# Altium PCB PCB layout.PcbDoc
Units mil, origin at the board's own origin, x right, y up, seen from the top; angles counter-clockwise.
Board outline 3670 x 2550 mil, 2 copper layers (Top Layer, Bottom Layer); 38 components, 49 nets, 170 pads, 6 vias.
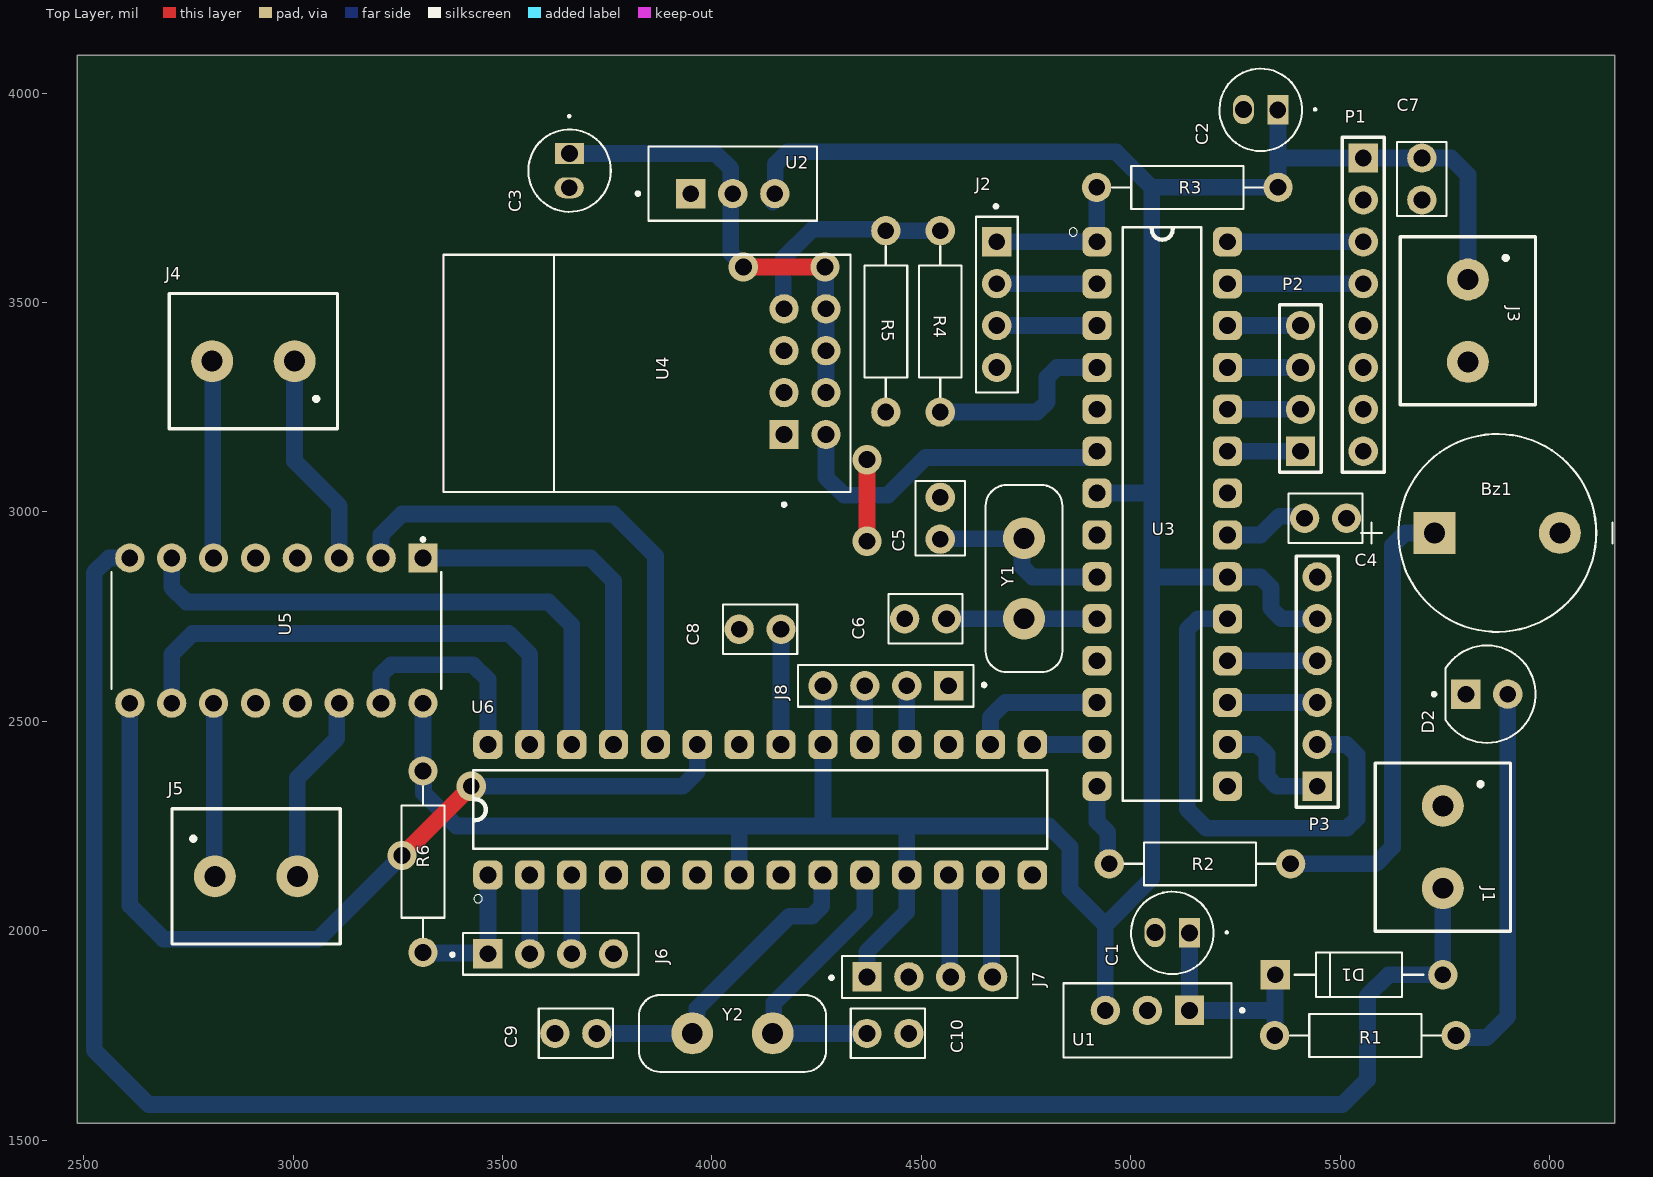
[diagram p0: Top Layer view]
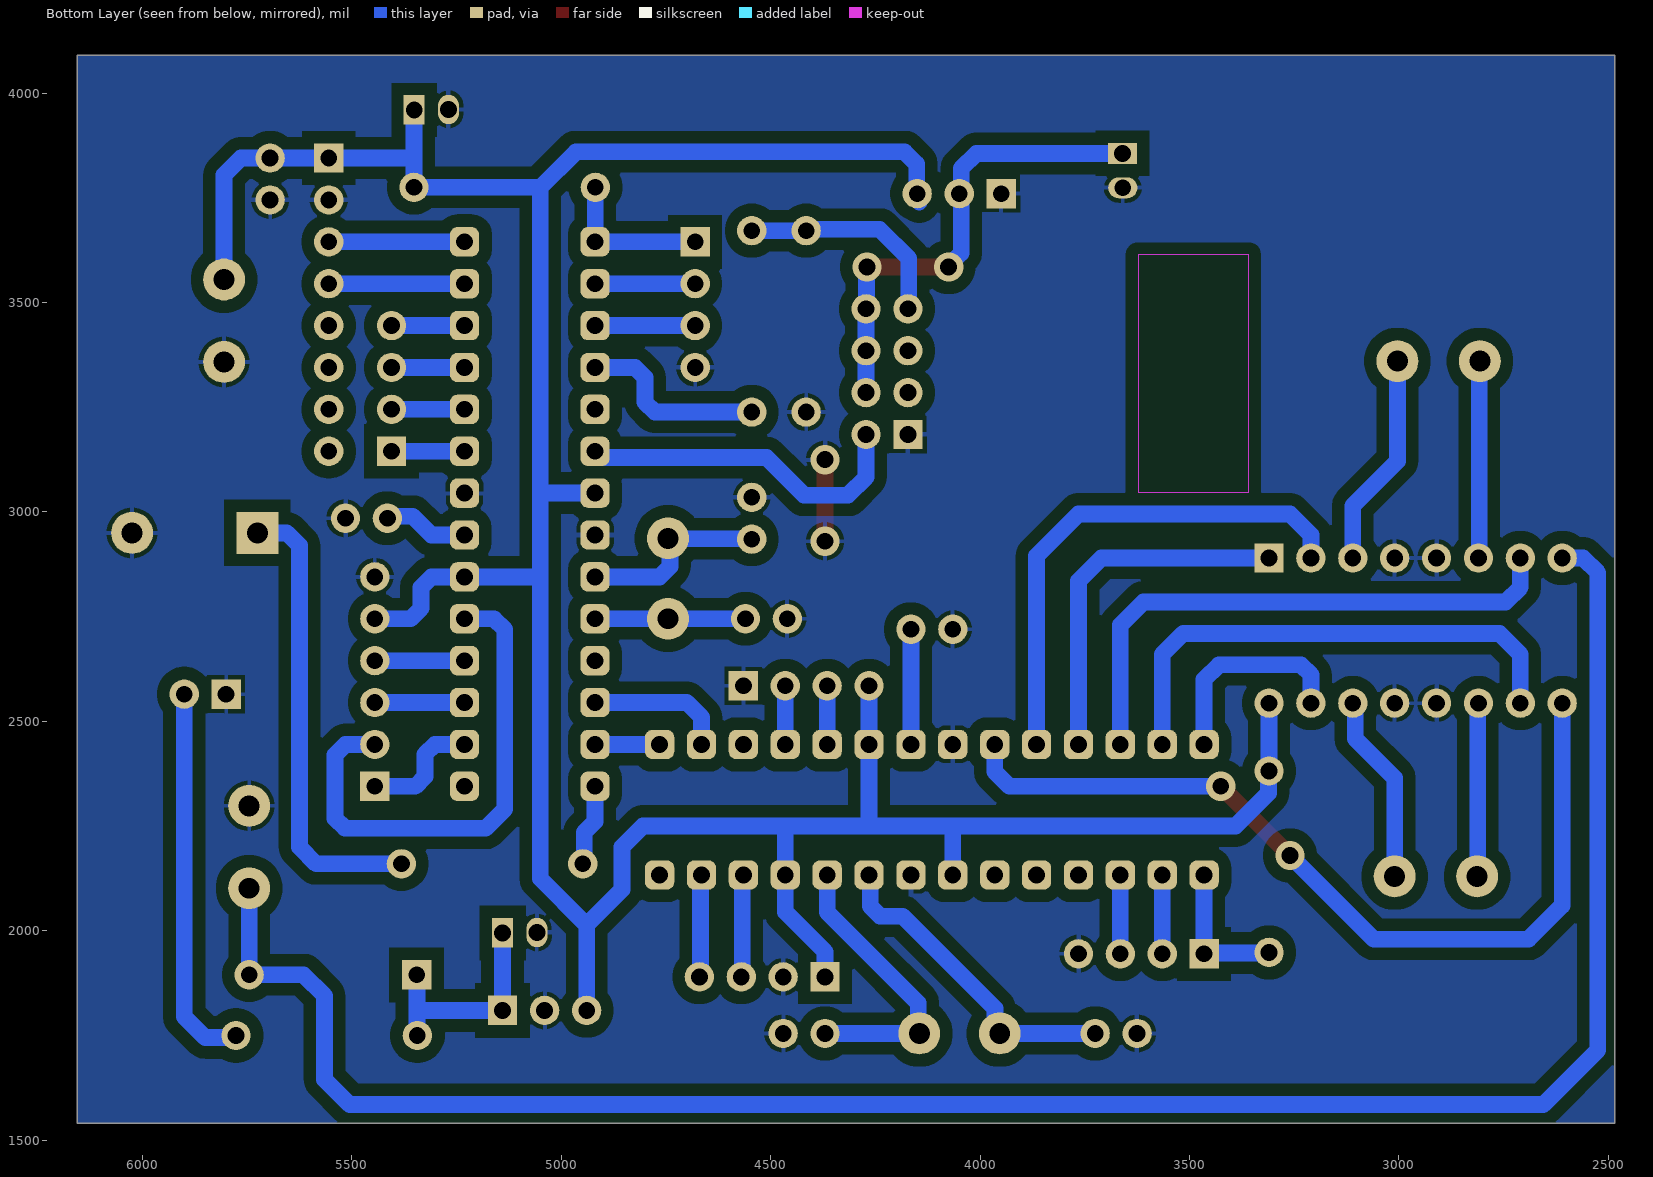
[diagram p1: Bottom Layer view, seen from below]
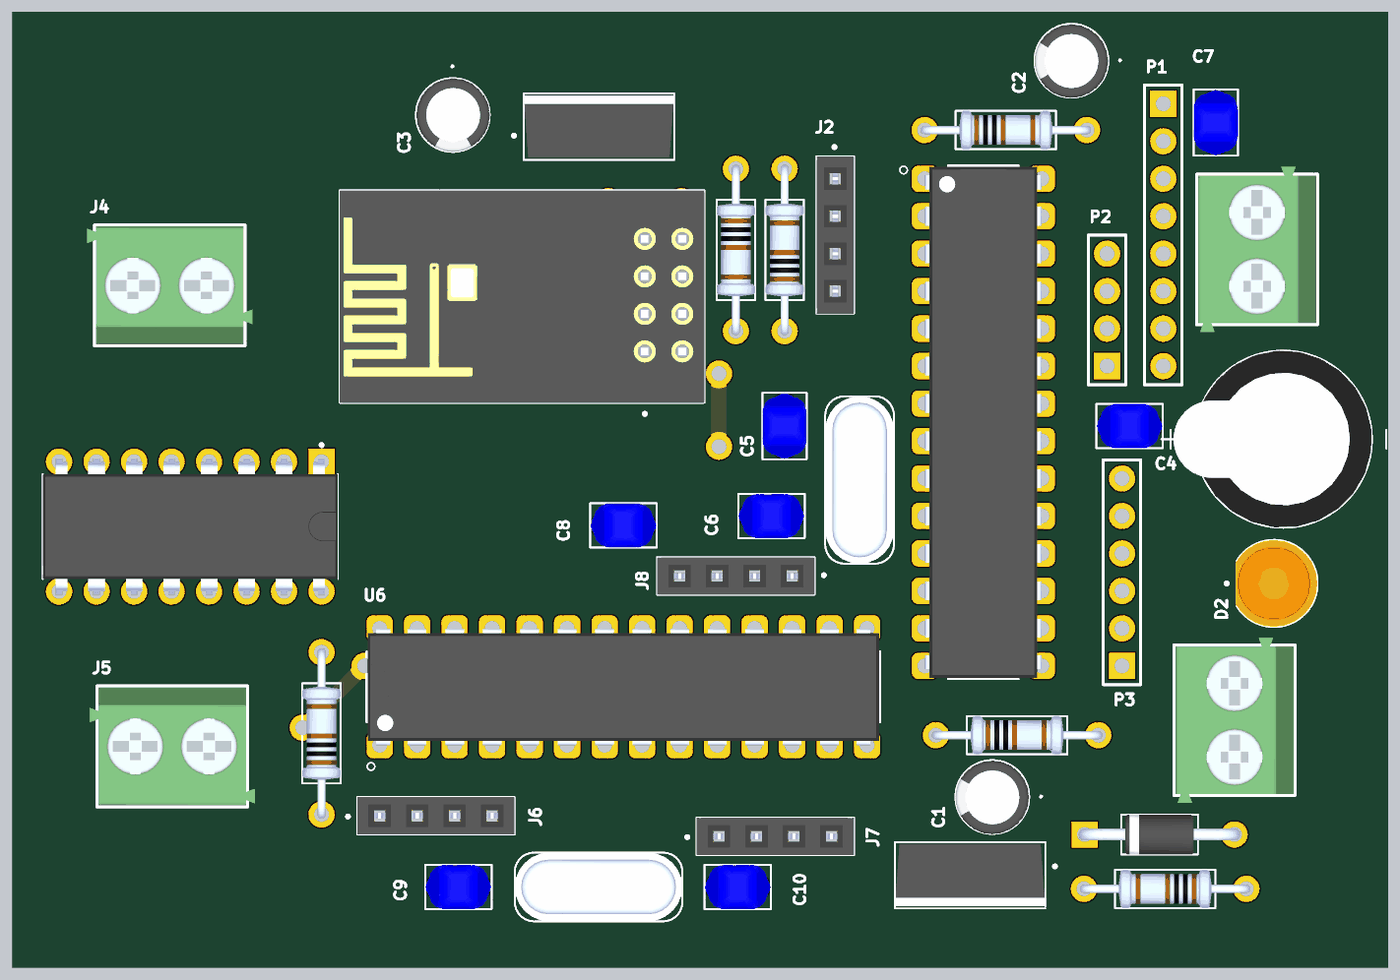
[diagram p2: 3D render of the assembled board from above, using the file's embedded part models]

## Layer stack, top to bottom
Top Solder: solder mask 0.4, Solder Resist, Dk 3.5
Top Layer: signal copper 1.4
Dielectric 1: dielectric 12.6, FR-4, Dk 4.8
Bottom Layer: signal copper 1.4
Bottom Solder: solder mask 0.4, Solder Resist, Dk 3.5

## Board outline
2485,1540 6155,1540 6155,4090 2485,4090

## Design rules (kind name [scope] priority, off if disabled: settings)
Clearance [All] p1: gap=30 ignorepadtopadclearanceinfootprint=FALSE
PolygonConnect [All] p1: connectstyle=Relief reliefconductorwidth=10 reliefentries=4 polygonreliefangle="90 Angle" airgapwidth=10
RoutingVias [All] p1: holewidth=40 width=70 viastyle="Through Hole" minholewidth=40 minwidth=70 maxholewidth=40 maxwidth=70
SolderMaskExpansion [All] p1: expansion=4 istentingtop=FALSE
Width [All] p1: maxlimit=60 minlimit=40 preferedwidth=50
30 further rules are at their usual default settings.

## Classes and differential pairs
component class "schematic sheet2": C7 C8 C9 C10 J3 J4 J5 J6 J7 J8 R6 U5 U6 Y2
component class "schematic sheet1": Bz1 C1 C2 C3 C4 C5 C6 D1 D2 J1 J2 P1 P2 P3 R1 R2 R3 R4 R5 U1 U2 U3 U4 Y1

## Components (designator, comment, footprint, x,y, rotation, side; value= is the part's Value field where it differs from the comment)
Bz1 "AI-1223-TWT-12V-R" XDCR_AI-1223-TWT-12V-R 5875,2950 r90 top
C1 "100uF" CAPPRD500W50D500H1100 5099,1995 r180 top
C2 "10uF" CAPPRD500W50D500H1100 5310,3960 r180 top
C3 "10uF" CAPPRD500W50D500H1100 3660,3815 r270 top
C4 "100nF" CAPRB500W50L450T300H550 5415,2985 r0 top
C5 "22pF" CAPRB500W50L450T300H550 4545,2935 r90 top
C6 "22pF" CAPRB500W50L450T300H550 4560,2745 r180 top
C7 "100nF" CAPRB500W50L450T300H550 5695,3745 r90 top
C8 "100nF" CAPRB500W50L450T300H550 4165,2720 r180 top
C9 "22pF" CAPRB500W50L450T300H550 3725,1755 r180 top
C10 "22pF" CAPRB500W50L450T300H550 4370,1755 r0 top
D1 "1N4007" DIOAD1060W80L520D270 5545,1895 r0 top
D2 "L08R5000Q1" LEDRD254W57D500H1070 5850,2565 r0 top
J1 "TBlock 2" 691111710002 5745,2200 r270 top
J2 "Header 4" SULLINS_PPTC041LFBN-RC 4680,3495 r270 top
J3 "TBlock 2" 691111710002 5805,3456.57 r270 top
J4 "691111710002" 691111710002 2905,3360 r180 top
J5 "691111710002" 691111710002 2911.57,2130 r0 top
J6 "Header 4" SULLINS_PPTC041LFBN-RC 3615,1945 r0 top
J7 "Header 4" SULLINS_PPTC041LFBN-RC 4520,1890 r0 top
J8 "Header 4" SULLINS_PPTC041LFBN-RC 4415,2585 r180 top
P1 "Header 8" HDR1X8 5555,3845 r270 top
P2 "Header 4" HDR1X4 5405,3145 r90 top
P3 "Header 6" HDR1X6 5445,2345 r90 top
R1 "1k" RESAD1100W55L680D260 5560,1750 r0 top
R2 "100" RESAD1100W55L680D260 5165,2160 r180 top
R3 "10k" RESAD1100W55L680D260 5135,3775 r180 top
R4 "1k1" RESAD1100W55L680D260 4545,3455 r270 top
R5 "2.2k" RESAD1100W55L680D260 4415,3455 r90 top
R6 "10k" RESAD1100W55L680D260 3310,2165 r270 top
U1 "LM7805" TO255P1020X450X1968-3 5039.61,1786.18 r180 top
U2 "LD1117V33" TO255P1020X450X1968-3 4049.61,3783.82 r0 top
U3 "ATMEGA328P-PU" DIP794W46P254L2967H457Q28B 5075,2995 r0 top
U4 "ESP8266-01/ESP-01" XCVR_ESP8266-01/ESP-01 3845,3335 r90 top
U5 "L293D" DIP880W50P254L2000H510Q16 2960,2716.77 r270 top
U6 "ATMEGA328P-PU" DIP794W46P254L2967H457Q28B 4115,2289.09 r90 top
Y1 "16MHz" XTAL_ECS-160-20-4X 4745,2841.06 r270 top
Y2 "16MHz" XTAL_ECS-160-20-4X 4048.94,1755 r0 top

## Footprints (in the part's own frame and the unit in brackets; to place one, negate y for a bottom-side part, rotate by r counter-clockwise, add the part's x,y. Pads: shape width x height; smd on the part's side, far side on the other; paste and mask are expansions set on the pad)
691111710002 [mm]
  round 2.54 hole 1.27: 1(-2.5,0) 2(2.5,0)
  silkscreen extent -5.1,-4.1 5.1,4.1, body extent -5.6,-4 5.6,4, height 11.01
CAPPRD500W50D500H1100 [mil]
  oval 50x70 hole 40: N(41,-1)
  rect 50x70 hole 40: P(-41,0)
  silkscreen extent -131,-98 98,98, body extent -108,-97 108,99, height 434
CAPRB500W50L450T300H550 [mil]
  round 70 hole 40: 1(0,0) 2(100,0)
  silkscreen extent -39,-59 139,59, body extent -38,-59 138,59, height 210
DIOAD1060W80L520D270 [mil]
  round 70 hole 40: A(200,0)
  rect 70x70 hole 40: C(-200,0)
  silkscreen extent -154,-53 154,53, body extent -216,-53 216,53, height 99
DIP794W46P254L2967H457Q28B [mil]
  rrect50% 70x70 hole 40: 1(-155.91,650) 2(-155.91,550) 3(-155.91,450) 4(-155.91,350) 5(-155.91,250) 6(-155.91,150) 7(-155.91,50) 8(-155.91,-50) 9(-155.91,-150) 10(-155.91,-250) 11(-155.91,-350) 12(-155.91,-450) 13(-155.91,-550) 14(-155.91,-650) 15(155.91,-650) 16(155.91,-550) 17(155.91,-450) 18(155.91,-350) 19(155.91,-250) 20(155.91,-150) 21(155.91,-50) 22(155.91,50) 23(155.91,150) 24(155.91,250) 25(155.91,350) 26(155.91,450) 27(155.91,550) 28(155.91,650)
  silkscreen extent -223,-685 94,685, body extent -156,-682 156,683, height 180
DIP880W50P254L2000H510Q16 [mil]
  rect 70x70 hole 40: 1(-173.23,350)
  round 70 hole 40: 2(-173.23,250) 3(-173.23,150) 4(-173.23,50) 5(-173.23,-50) 6(-173.23,-150) 7(-173.23,-250) 8(-173.23,-350) 9(173.23,-350) 10(173.23,-250) 11(173.23,-150) 12(173.23,-50) 13(173.23,50) 14(173.23,150) 15(173.23,250) 16(173.23,350)
  silkscreen extent -221,-394 140,394, body extent -182,-394 182,394, height 201
HDR1X4 [mil] "Connector; Header; 4 Position"
  rect 70x70 hole 40: 1(0,0)
  round 70 hole 40: 2(100,0) 3(200,0) 4(300,0)
  silkscreen extent -50,-50 350,50
HDR1X6 [mil] "Connector; Header; 6 Position"
  rect 70x70 hole 40: 1(0,0)
  round 70 hole 40: 2(100,0) 3(200,0) 4(300,0) 5(400,0) 6(500,0)
  silkscreen extent -50,-50 550,50
HDR1X8 [mil] "Connector; Header; 8 Position"
  rect 70x70 hole 40: 1(0,0)
  round 70 hole 40: 2(100,0) 3(200,0) 4(300,0) 5(400,0) 6(500,0) 7(600,0) 8(700,0)
  silkscreen extent -50,-50 750,50
LEDRD254W57D500H1070 [mil]
  round 70 hole 40: A(50,0)
  rect 70x70 hole 40: C(-50,0)
  silkscreen extent -130,-116 116,116, body extent -102,-116 116,116, height 358
RESAD1100W55L680D260 [mil]
  round 70 hole 40: 1(-216.54,0) 2(216.54,0)
  silkscreen extent -180,-51 180,51, body extent -227,-51 227,51, height 101
SULLINS_PPTC041LFBN-RC [mil]
  rect 70x70 hole 40: 1(-150,0)
  round 70 hole 40: 2(-50,0) 3(50,0) 4(150,0)
  silkscreen extent -239,-50 210,50, body extent -210,-50 210,50, height 335
TO255P1020X450X1968-3 [mil]
  rect 70x70 hole 40: 1(-100.39,-23.82)
  round 70 hole 40: 2(0,-23.82) 3(100.39,-23.82)
  silkscreen extent -230,-89 201,89, body extent -200,-82 200,83, height 901
XCVR_ESP8266-01/ESP-01 [mil]
  rect 70x70 hole 40: 1(-150,-327.17)
  round 70 hole 40: 2(-50,-327.17) 3(50,-327.17) 4(150,-327.17) 5(-150,-427.17) 6(-50,-427.17) 7(50,-427.17) 8(150,-427.17)
  Keep-Out Layer region: 279.13,222.44 -287.8,222.44 -287.8,486.22 279.13,486.22
  silkscreen extent -321,-486 279,486, body extent -288,-486 278,486, height 256
XDCR_AI-1223-TWT-12V-R [mm]
  round 2.54 hole 1.27: N(0,-3.8)
  rect 2.54x2.54 hole 1.27: P(0,3.8)
  silkscreen extent -6,-6.98 6,8.25, body extent -6,-6 6,7.44, height 9.56
XTAL_ECS-160-20-4X [mm]
  round 2.54 hole 1.27: 1(-2.44,0) 2(2.44,0)
  silkscreen extent -5.68,-2.33 5.68,2.33, body extent -5.68,-2.32 5.68,2.32, height 3.5

## Part data
Bz1: library part Buzzer, "ELECTRO-MECHANICAL AUDIO INDICATOR", Package="2225 PUI Audio", Availability="In Stock", MF="PUI Audio,", MP=AI-1223-TWT-12V-R, Price=None, Purchase-URL=https://pricing.snapeda.com/search/part/AI-1223-TWT-12V-R/?ref=eda
C1 C2 C3: library part "Electrolytic capacitor", "FS-A", Package=None, Availability=Unavailable, MF="{'manufacturer': u'Panasonic'}", MP=EEUFS0J221B, Price=None
C4 C5 C6 C7 C8 C9 C10: library part "Ceramic capacitor", "2200 pF Â±10% 250V Ceramic Capacitor X7R Radial", Package="Radial TDK", Check_prices=https://www.snapeda.com/parts/FG24X7R2E222KNT06/TDK/view-part/?ref=eda, Digi-Key_Part_Number=445-173386-1-ND, MF=TDK, MP=FG24X7R2E222KNT06, Purchase-URL=https://pricing.snapeda.com/search/part/FG24X7R2E222KNT06/?ref=eda, SnapEDA_Link=https://www.snapeda.com/parts/FG24X7R2E222KNT06/TDK/view-part/?ref=snap
D1: "Diode Switching 1KV 1A 2-Pin DO-41", Package=None, Availability=Unavailable, MP=1N4007, Price=None
D2: library part LED, "LED, Orange, Through Hole, T-1 3/4 (5mm), 30 mA, 2.1 V, 635 nm", Package=None, Availability=Unavailable, MF="{'manufacturer': u'LED Technology'}", MP=L08R5000Q1, Price=None
J1 J3 J4 J5: library part "Terminal Block - 2Pins", "2 Position Wire to Board Terminal Block Horizontal with Board 0.197 _5.00mm_ Through Hole", Package=None, Availability=Unavailable, MF="Wurth Electronics", MP=691111710002, Price=None, SnapEDA_Link=https://www.snapeda.com/parts/691111710002/Wurth%20Electronics%20Inc./view-part/1195092/?ref=snap
J2 J6 J7 J8: library part "Female header - 4Pins", "4 Position Header Connector Through Hole", Package=None, Availability=Warning, Check_prices=https://www.snapeda.com/parts/PPTC041LFBN-RC/Sullins%20Connector%20Solutions/view-part/285917/?ref=eda, MF="Sullins Connector", MP=PPTC041LFBN-RC, Price=None, Purchase-URL=https://pricing.snapeda.com/search/part/PPTC041LFBN-RC/?ref=eda, SnapEDA_Link=https://www.snapeda.com/parts/PPTC041LFBN-RC/Sullins%20Connector%20Solutions/view-part/285917/?ref=snap
P1: "Header, 8-Pin", LatestRevisionDate=17-Jul-2002, LatestRevisionNote="Re-released for DXP Platform.", Publisher="Altium Limited"
P2: "Header, 4-Pin", LatestRevisionDate=17-Jul-2002, LatestRevisionNote="Re-released for DXP Platform.", Publisher="Altium Limited"
P3: "Header, 6-Pin", LatestRevisionDate=17-Jul-2002, LatestRevisionNote="Re-released for DXP Platform.", Publisher="Altium Limited"
R1 R2 R3 R4 R5 R6: library part "Resistor (0.25W)", "(MFR-25FBF52-10K) 10,2 kOhm bei 1% 0,25W, 1/4W Durchbohrlochwiderstand Axial Metal Film", Package="Axial Yageo", Digi-Key_Part_Number=10.2KXBK-ND, MF=Yageo, MP=MFR-25FBF52-10K, Purchase-URL=https://pricing.snapeda.com/search/part/MFR-25FBF52-10K/?ref=eda, SnapEDA_Link=https://www.snapeda.com/parts/MFR-25FBF52-10K/Yageo/view-part/424333/?ref=snap
U1: library part LM78__, Package=None, Availability=Unavailable, MP=LM7805CT/NOPB, Price=None
U2: Package=None, Availability=Unavailable, MP=LD1117V33, Price=None
U3 U6: "ATmega Series 20 MHz 32 KB Flash 2 KB SRAM 8-Bit Microcontroller - DIP-28", Package=None, Availability=Unavailable, MP=ATMEGA328P-PU, Price=None
U4: library part "ESP8266-01 Module", "MakerFocus 4pcs ESP8266 ESP-01 Serial Wireless WiFi Transceiver Receiver Module 1MB SPI Flash DC3.0-3.6V Internet of Things WiFi Module Board Compatible with Ar duino", Package=None, Availability=Unavailable, MP=ESP8266-01/ESP-01, Price=None
U5: "4-Channel Motor Driver 24V 16-Pin Power PDIP Tube", Package=None, Availability=Unavailable, MP=L293D, Price=None
Y1 Y2: library part "Crystal oscilator", "CRYSTAL T/H", Package=None, Availability=Unavailable, MF="{'manufacturer': u'ECS Inc.'}", MP=ECS-160-S-4, Price=None

## Via types
v1: diameter 70, hole 40, Top Layer to Bottom Layer, 6 vias

## Nets (pads, with @x,y where several pads share a name; then routed paths per layer and width w, separated by ;. In a path a pad name is that pad's centre, name@x,y a point inside that pad or via, vN(x,y) a via of type N, cw(c..) or ccw(c..) an arc to the next point about the centre after c; other vN are vias at no path point)
+3V3: C3.P U2.2 U4.6 U4.7 U4.8 | length 1143.2
  Top Layer w40: v1(4075,3585) v1(4270,3585)
  Bottom Layer w40: C3.P 4009,3856 4045,3820 4045,3740 4045,3617.71 4075,3587.71 v1(4075,3585) ; v1(4270,3585) 4271.08,3583.92 4271.08,3486.08 U4.8 U4.7 U4.6
alcohol: P2.4 U3.26 | length 174.1
  Bottom Layer w40: U3.26 P2.4
Battery: D1.A J1.2 U5.8 | length 4965.5
  Bottom Layer w40: U5.8 2560,2890 2525,2855 2525,1715 2655,1585 5505,1585 5565,1645 5565,1845 5615,1895 D1.A J1.2
bt_rx: J7.4 U6.13 | length 245.3
  Bottom Layer w40: U6.13 4667.5,2130.69 4667.5,1892.5 J7.4
bt_tx: J7.3 U6.12 | length 245.3
  Bottom Layer w40: U6.12 4567.5,2130.69 4567.5,1892.5 J7.3
buzzer: R2.2 U3.14 | length 197.2
  Bottom Layer w40: U3.14 4919.09,2260.91 4945,2235 4945,2163.46 R2.2
CS: P3.1 U3.16 | length 286.6
  Bottom Layer w40: U3.16 5301.57,2445 5325,2421.57 5325,2368.43 5348.43,2345 P3.1
esp_rx: R4.2 U3.4 | length 453.2
  Bottom Layer w40: R4.2 4776.57,3238.46 4800,3261.9 4800,3321.57 4823.43,3345 U3.4
esp_tx: U3.6 U4.5 | length 810.3
  Bottom Layer w40: U4.5 4272.17,3082.83 4315,3040 4420,3040 4510,3130 4904.09,3130 U3.6
flame: P2.1 U3.23 | length 174.1
  Bottom Layer w40: U3.23 P2.1
GND: Bz1.N C1.N C2.N C3.N C4.2 C5.2 C6.2 C7.1 C8.2 C9.2 C10.2 D2.C J1.1 J2.4 J3.2 J6.4 J7.2 J8.1 P1.2 P3.6 R5.1 U1.2 U2.1 U3.8 U3.22 U4.1 U5.4 U5.5 U5.12 U5.13 U6.8 U6.22 | length 195
  Top Layer w40: v1(4370,2930) v1(4370,3125)
gps_rx: J8.3 U6.19 | length 140
  Bottom Layer w40: U6.19 J8.3
gps_tx: J8.2 U6.18 | length 140
  Bottom Layer w40: U6.18 J8.2
MISO: P3.4 U3.18 | length 214.1
  Bottom Layer w40: U3.18 P3.4
MOSI: P3.3 U3.17 | length 214.1
  Bottom Layer w40: U3.17 P3.3
motor_enable1: U5.1 U6.25 | length 867.8
  Bottom Layer w40: U5.1 3710,2890 3765,2835 U6.25
motor_enable2: U5.9 U6.23 | length 2102.4
  Top Layer w40: v1(3260,2180) v1(3425,2345)
  Bottom Layer w40: U5.9 2610,2060 2690,1980 3060,1980 v1(3260,2180) ; v1(3425,2345) 3930,2345 3965,2380 U6.23
motor_pin1: U5.2 U6.24 | length 1222.1
  Bottom Layer w40: U5.2 3210,2945 3260,2995 3765,2995 3865,2895 U6.24
motor_pin2: U5.7 U6.26 | length 1347.3
  Bottom Layer w40: U5.7 2710,2820 2745,2785 3610,2785 3665,2730 U6.26
motor_pin3: U5.10 U6.27 | length 1227.9
  Bottom Layer w40: U5.10 2710,2660 2760,2710 3515,2710 3565,2660 U6.27
motor_pin4: U5.15 U6.28 | length 502.2
  Bottom Layer w40: U5.15 3210,2611.57 3233.43,2635 3430,2635 3465,2600 U6.28
NetBz1_P: Bz1.P R2.1 | length 1092.9
  Bottom Layer w40: R2.1 5585,2160 5625,2200 5625,2920 5655,2950 Bz1.P
NetC1_P: C1.P D1.C R1.1 U1.1 | length 525.7
  Bottom Layer w40: C1.P@5138,1985 5140.04,1982.96 U1.1 ; U1.1 5344.23,1810 ; R1.1 5344.23,1750.77 5344.23,1810 ; D1.C 5344.23,1894.23 5344.23,1810
NetC4_1: C4.1 U3.21 | length 204.8
  Bottom Layer w40: U3.21 5310,2945 5355,2990 5410,2990 C4.1
NetC8_1: C8.1 U6.21 | length 275
  Bottom Layer w40: U6.21 C8.1
NetD2_A: D2.A R1.2 | length 916.2
  Bottom Layer w40: R1.2 5781.54,1745 5850,1745 5900,1795 D2.A
NetJ4_1: J4.1 U5.3 | length 514.1
  Bottom Layer w40: J4.1 3003.43,3121.57 3110,3015 U5.3
NetJ4_2: J4.2 U5.6 | length 471.4
  Bottom Layer w40: J4.2 2808.29,3358.29 2808.29,2891.71 U5.6
NetJ5_1: J5.1 U5.11 | length 414.8
  Bottom Layer w40: U5.11 2811.57,2541.97 2811.57,2131.57 J5.1
NetJ5_2: J5.2 U5.14 | length 455
  Bottom Layer w40: J5.2 3010,2365 3104.26,2459.26 3104.26,2537.8 U5.14
NetR4_1: R4.1 R5.2 U4.4 | length 525.6
  Bottom Layer w40: U4.4@4170,3485 4170,3605.21 4239.79,3675 4411.54,3675 R5.2 R4.1
NetU3_12: U3.12 U6.16 | length 333.6
  Bottom Layer w40: U6.16 4665,2510 4700,2545 U3.12
NetU3_13: U3.13 U6.15 | length 154.1
  Bottom Layer w40: U6.15 U3.13
reset1: J2.1 R3.2 U3.1 | length 369.4
  Bottom Layer w40: J2.1 U3.1 4918.78,3645.32 4918.78,3774.69 R3.2
reset2: J6.1 R6.2 U6.1 | length 344.6
  Bottom Layer w40: R6.2 3311.73,1946.73 3463.27,1946.73 J6.1 U6.1
rx1: J2.3 U3.3 | length 239.1
  Bottom Layer w40: J2.3 U3.3
rx2: J6.3 U6.3 | length 188.2
  Bottom Layer w40: J6.3 U6.3
SCK: P3.2 U3.19 | length 1226.5
  Bottom Layer w40: U3.19 5160,2745 5135,2720 5135,2290 5180,2245 5516.57,2245 5540,2268.43 5540,2420 5515,2445 P3.2
SCL: P1.3 U3.28 | length 324.1
  Bottom Layer w40: U3.28 P1.3
SDA: P1.4 U3.27 | length 324.1
  Bottom Layer w40: U3.27 P1.4
smoke: P2.2 U3.24 | length 174.1
  Bottom Layer w40: U3.24 P2.2
tx1: J2.2 U3.2 | length 239.1
  Bottom Layer w40: J2.2 U3.2
tx2: J6.2 U6.2 | length 188.2
  Bottom Layer w40: J6.2 U6.2
VCC: C2.P C7.2 J3.1 J7.1 J8.4 P1.1 P3.5 R3.1 R6.1 U1.3 U2.3 U3.7 U3.20 U5.16 U6.7 U6.11 U6.20 | length 7746.6
  Bottom Layer w40: U5.16 R6.1 3311.41,2380.13 3311.41,2328.59 3390,2250 4065,2250 ; U6.7 4065,2250 ; U2.3@4145.39,3740 4145.39,3760 4151.13,3765.74 4151.13,3831.13 4180,3860 4965,3860 5050,3775 5050,3770 ; J8.4 U6.20 4265,2250 ; J7.1 4370,1950 4465,2045 U6.11 4465,2250 ; U3.7 5040,3045 5050,3035 ; U1.3 4939.21,2014.21 ; C2.P 5351.27,3959.73 5351.27,3850 ; P3.5 5360,2745 5335,2770 5335,2820 5310,2845 U3.20 5050,2845 ; J3.1 5805,3805 5765,3845 C7.2 P1.1 5356.27,3845 5351.27,3850 ; 4065,2250 4265,2250 ; 4265,2250 4465,2250 ; 4465,2250 4805,2250 4855,2200 4855,2098.43 4939.21,2014.21 ; 4939.21,2014.21 5050,2125 5050,2845 ; 5050,2845 5050,3035 ; 5050,3035 5050,3770 ; 5050,3770 5055,3775 R3.1 5351.27,3775.27 5351.27,3850
vibration: P2.3 U3.25 | length 174.1
  Bottom Layer w40: U3.25 P2.3
xtal1_1: C5.1 U3.9 Y1.1 | length 458
  Bottom Layer w40: C5.1 4546.06,2936.06 Y1.1@4743.94,2936.06 ; Y1.1 Y1.1@4743.94,2936.06 ; U3.9 4765,2845 4740,2870 4740,2932.13 Y1.1@4743.94,2936.06
xtal1_2: C9.1 U6.9 Y2.1 | length 766.7
  Bottom Layer w40: C9.1 Y2.1 3964.35,1766.48 3964.35,1814.35 4185,2035 4238.54,2035 4261.97,2058.43 4261.97,2130.16 U6.9
xtal2_1: C6.1 U3.10 Y1.2 | length 359.1
  Bottom Layer w40: C6.1 Y1.2 U3.10
xtal2_2: C10.1 U6.10 Y2.2 | length 694.3
  Bottom Layer w40: U6.10 4365,2045 4147.78,1827.78 4147.78,1757.78 Y2.2 C10.1
pads on no net: P1.5 P1.6 P1.7 P1.8 U3.5 U3.11 U3.15 U4.2 U4.3 U6.4 U6.5 U6.6 U6.14 U6.17

## Polygon pours and split planes (outlines as drawn)
GND on Bottom Layer "GND_L02_P000" (solid, pour order 0): 2485,4090 2485,1540 6155,1540 6155,4090